# Altium PCB PCB1.PcbDoc
Units mm, origin at the board's own origin, x right, y up, seen from the top; angles counter-clockwise.
Board outline 50.55 x 34.54 mm, 4 copper layers (Top Layer, GND, 3V3, Bottom Layer), stack 0.778 mm thick; 45 components, 36 nets, 199 pads, 54 vias.
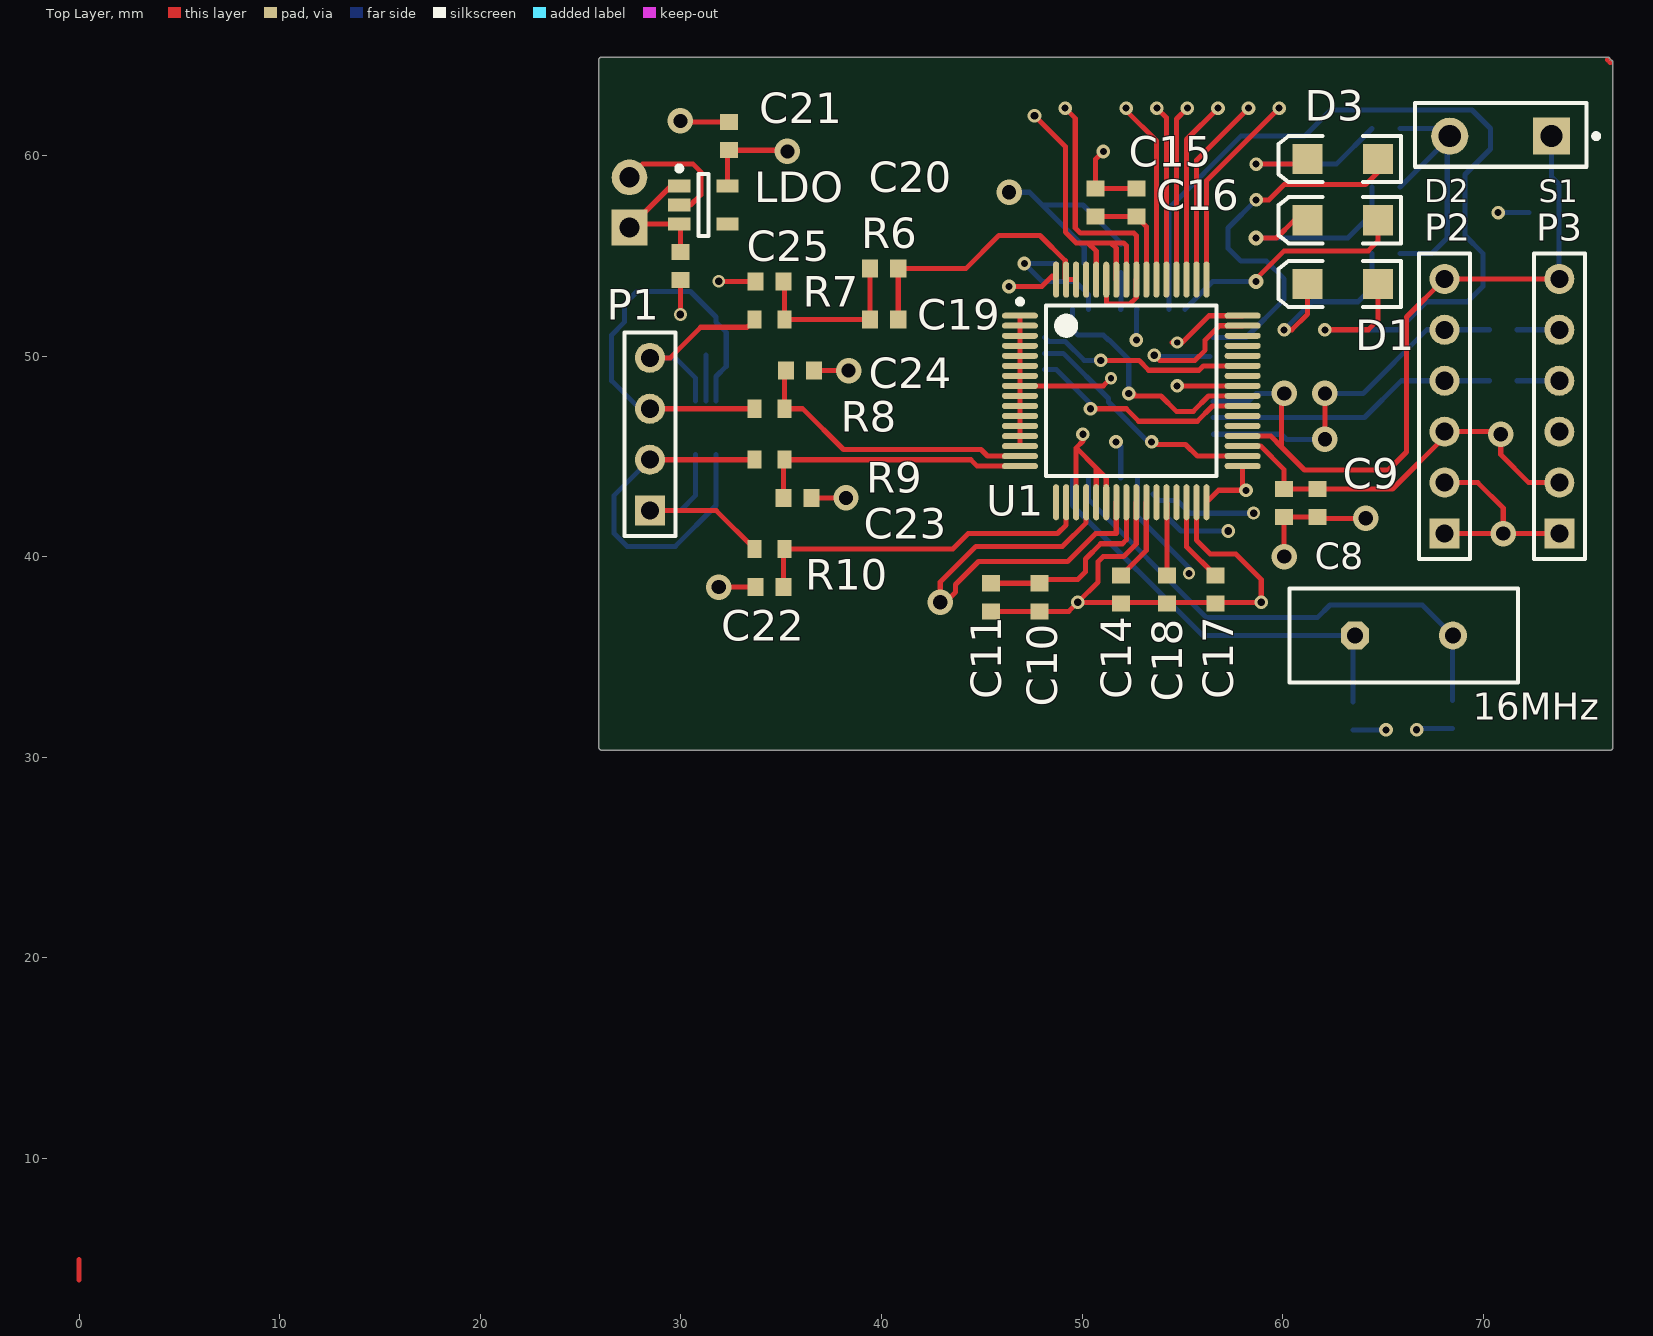
[diagram p0: Top Layer view]
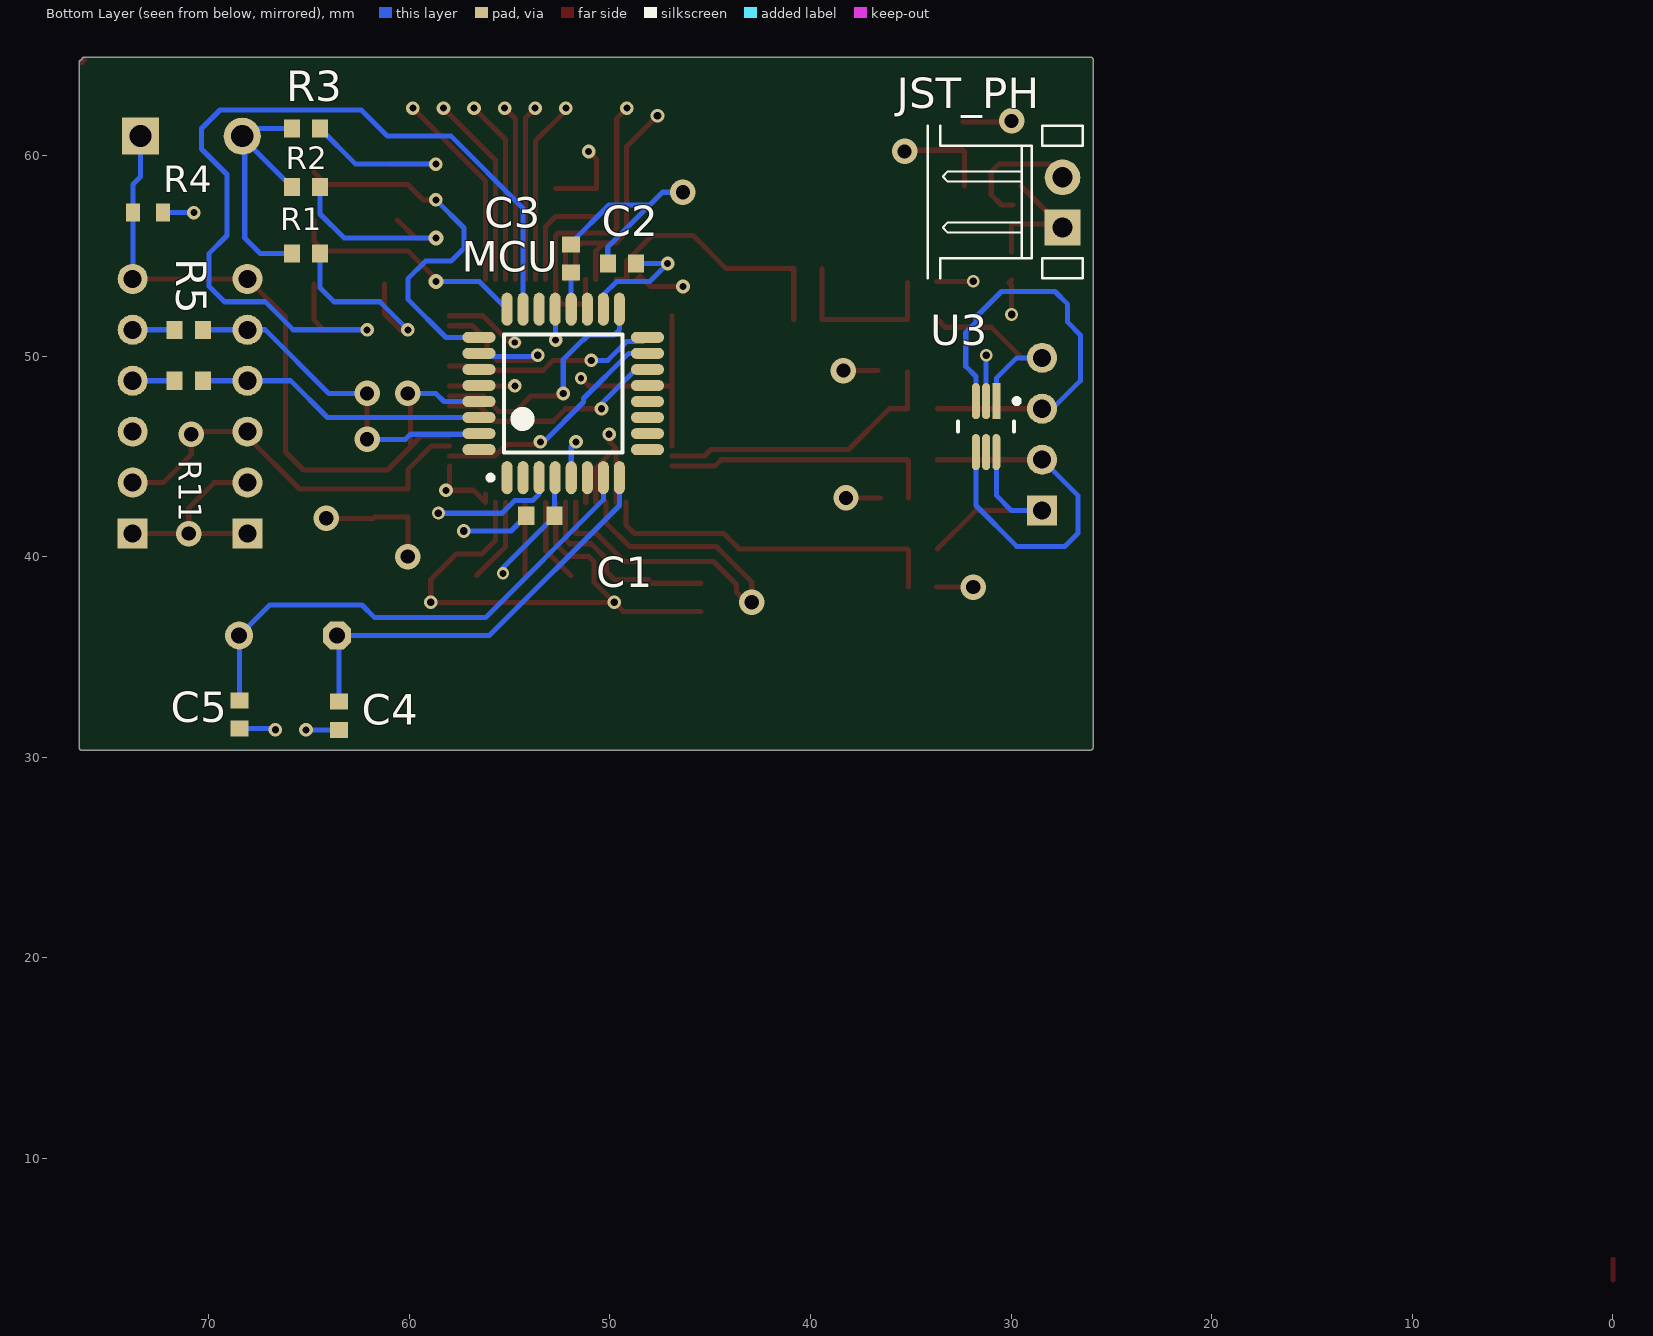
[diagram p1: Bottom Layer view, seen from below]
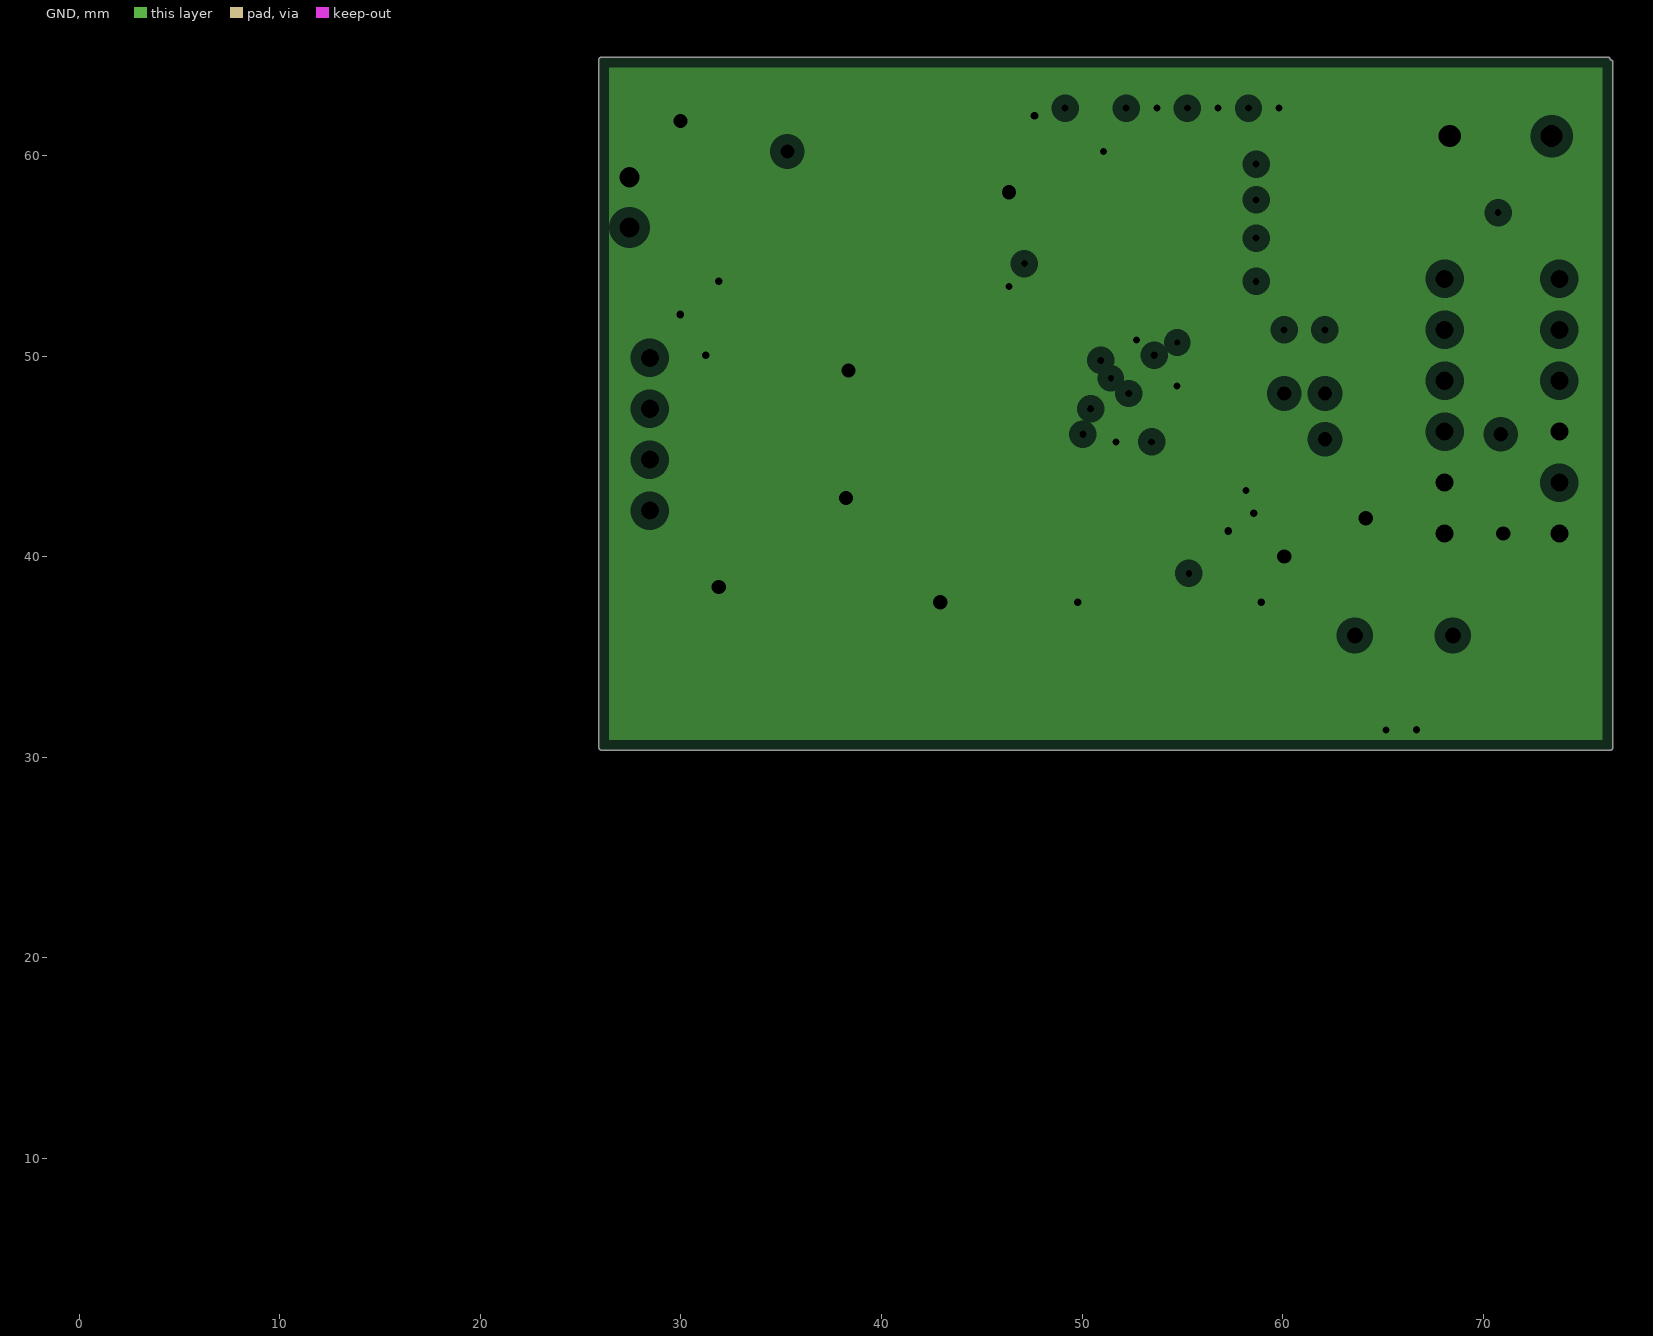
[diagram p2: GND, clearances drawn from the general rule]
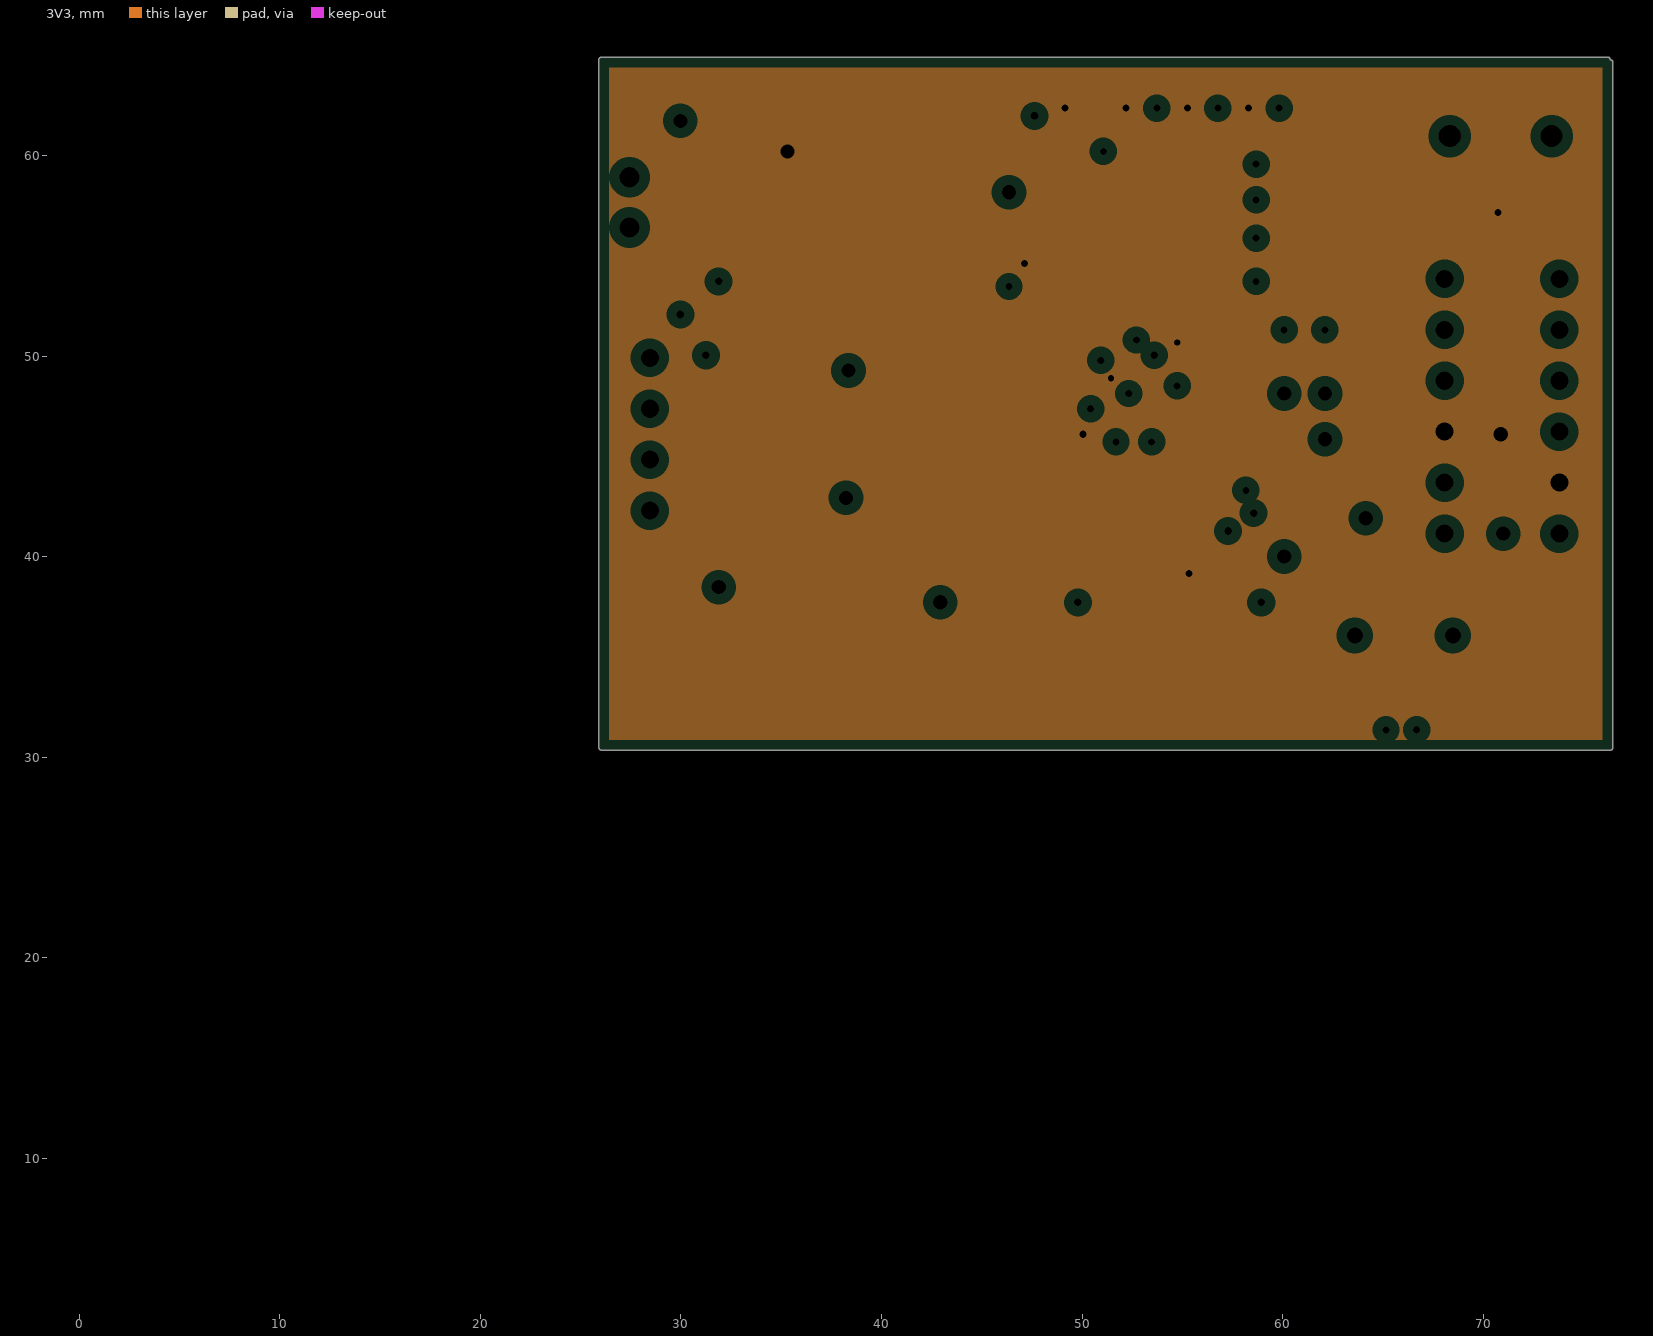
[diagram p3: 3V3, clearances drawn from the general rule]

## Layer stack, top to bottom
Top Solder: solder mask 0.0102, Solder Resist, Dk 3.5
Top Layer: signal copper 0.0356
Dielectric 1: core 0.254, FR-4, Dk 4.2
GND: plane copper 0.036, net GND
Dielectric 3: prepreg 0.127, FR-4, Dk 4.2
3V3: plane copper 0.036, net 3V3
Dielectric 2: core 0.254, FR-4, Dk 4.2
Bottom Layer: signal copper 0.0356
Bottom Solder: solder mask 0.0102, Solder Resist, Dk 3.5

## Board outline
26.035,30.353 cw(c26.035,30.48) 25.908,30.48 25.908,64.77 cw(c26.035,64.77) 26.035,64.897 76.2,64.897 cw(c76.2,64.77) 76.327,64.77 cw(c76.327,64.643) 76.454,64.643 76.454,30.48 cw(c76.327,30.48) 76.327,30.353

## Design rules (kind name [scope] priority, off if disabled: settings)
Clearance [All] p1: gap=0.254 except(0.102: SMDPad-SMDPad; 0.18: Track-SMDPad; 0.24: Track-Track)
MinimumSolderMaskSliver [All] p1: minsoldermaskwidth=0.004
PlaneClearance [All] p1: clearance=0.508
PlaneConnect [All] p1: planeconnectstyle=Relief reliefexpansion=0.508 reliefentries=4 reliefconductorwidth=0.254 reliefairgap=0.254
PolygonConnect [All] p1: connectstyle=Relief reliefconductorwidth=0.254 reliefentries=4 polygonreliefangle="90 Angle" airgapwidth=0.254
RoutingVias [All] p1: holewidth=0.711 width=1.27 viastyle="Through Hole" minholewidth=0.711 minwidth=1.27 maxholewidth=0.711 maxwidth=1.27
SolderMaskExpansion [All] p1: expansion=0.102
UnpouredPolygon [All] p1: allowunpoured=FALSE
Width [All] p1: maxlimit=0.254 minlimit=0.254 preferedwidth=0.254
26 further rules are at their usual default settings.

## Classes and differential pairs
component class U_LP590_LDO_Regulator: C20 C21 JST_PH LDO
component class U_Atmega328p: 16MHz C1 C2 C3 C4 C5 D1 D2 D3 MCU P2 P3 R1 R2 R3 R4 R5 R11 S1
component class U_Analogue_frontend: C22 C23 C24 C25 P1 R7 R8 R9 R10 U3
component class U_ADS1299: C8 C9 C10 C11 C14 C15 C16 C17 C18 C19 R6 U1

## Components (designator, comment, footprint, x,y, rotation, side; value= is the part's Value field where it differs from the comment)
16MHz "ECS-10-13-1" HC-49U 66.04,36.068 r0 top
C1 "Cap" 1608[0603] 53.467,42.037 r180 bottom
C2 "Cap" 1608[0603] 49.403,54.61 r180 bottom
C3 "Cap" 1608[0603] 51.943,54.864 r270 bottom
C4 "Cap" 1608[0603] 63.5,32.066 r90 bottom
C5 "Cap" 1608[0603] 68.453,32.131 r90 bottom
C8 "Cap" 1608[0603] 60.071,42.672 r90 top
C9 "Cap" 1608[0603] 61.722,42.672 r90 top
C10 "Cap" 1608[0603] 47.879,37.973 r270 top
C11 "Cap" 1608[0603] 45.466,37.973 r270 top
C14 "Cap" 1608[0603] 51.943,38.354 r90 top
C15 "Cap" 1608[0603] 50.673,57.658 r270 top
C16 "Cap" 1608[0603] 52.705,57.658 r270 top
C17 "Cap" 1608[0603] 56.642,38.354 r90 top
C18 "Cap" 1608[0603] 54.229,38.354 r90 top
C19 "Cap" 1608[0603] 40.132,51.816 r180 top
C20 "GRM188R71A225KE15D" 1608[0603] 29.972,54.483 r90 top
C21 "GRM188R71A225KE15D" 1608[0603] 32.385,60.96 r270 top
C22 "Cap Semi" 1608[0603] 34.417,38.481 r0 top
C23 "Cap Semi" 1608[0603] 35.814,42.926 r180 top
C24 "Cap Semi" 1608[0603] 35.941,49.276 r180 top
C25 "Cap Semi" 1608[0603] 34.417,53.721 r0 top
D1 "LED2" 3.2X1.6X1.1 62.992,53.594 r180 top
D2 "LED2" 3.2X1.6X1.1 62.992,56.769 r180 top
D3 "LED2" 3.2X1.6X1.1 62.992,59.817 r180 top
JST_PH "ValueValueAux" S2B-EH 27.432,57.658 r90 bottom
LDO "LP5907MFX-3.3/NOPB" DBV005_N 31.115,57.531 r0 top (schematic designator "LDO Regulator")
MCU "ATmega328-AUR" 32A_N 52.324,48.133 r90 bottom
P1 "Electrode connections" HDR1X4 28.448,42.291 r90 top
P2 "FTDI" HDR1X6 68.072,41.148 r90 top
P3 "BlueSMiRF" HDR1X6 73.787,41.148 r90 top
R1 "Res" 1608[0603] 65.151,55.118 r180 bottom
R2 "Res" 1608[0603] 65.151,58.42 r180 bottom
R3 "Res" 1608[0603] 65.151,61.341 r180 bottom
R4 "Res" J1-0603 73.025,57.15 r180 bottom
R5 "Res" 1608[0603] 70.993,51.308 r0 bottom
R6 "Res" 1608[0603] 40.132,54.356 r180 top
R7 "Res3" J1-0603 34.417,51.816 r0 top
R8 "Res3" J1-0603 34.417,47.371 r0 top
R9 "Res3" J1-0603 34.417,44.831 r0 top
R10 "Res3" J1-0603 34.417,40.386 r0 top
R11 "Res" 1608[0603] 70.993,48.768 r0 bottom
S1 "SW-SPST" SPST-2 70.866,60.96 r180 top
U1 "Integrated ECG/EEG" TQFP-PT64_N 52.451,48.26 r0 top
U3 "TPD4E1B06DRLR" SOT50P185X60-6N 31.242,46.482 r270 bottom (schematic designator *)

## Footprints (in the part's own frame and the unit in brackets; to place one, negate y for a bottom-side part, rotate by r counter-clockwise, add the part's x,y. Pads: shape width x height; smd on the part's side, far side on the other; paste and mask are expansions set on the pad)
3.2X1.6X1.1 [mm] "SMT LED; 2 Flat Leads"
  rect 1.5x1.5 smd: 1(-1.75,0) 2(1.75,0)
  silkscreen extent -2.9,-1.15 3.2,1.15
32A_N [mm] "Thin QFP, 32-Leads, Body 7x7mm, Pitch 0.8mm, IPC Medium Density"
  oval 1.65x0.55 smd: 1(-4.2,2.8) 2(-4.2,2) 3(-4.2,1.2) 4(-4.2,0.4) 5(-4.2,-0.4) 6(-4.2,-1.2) 7(-4.2,-2) 8(-4.2,-2.8) 17(4.2,-2.8) 18(4.2,-2) 19(4.2,-1.2) 20(4.2,-0.4) 21(4.2,0.4) 22(4.2,1.2) 23(4.2,2) 24(4.2,2.8)
  oval 0.55x1.65 smd: 9(-2.8,-4.2) 10(-2,-4.2) 11(-1.2,-4.2) 12(-0.4,-4.2) 13(0.4,-4.2) 14(1.2,-4.2) 15(2,-4.2) 16(2.8,-4.2) 25(2.8,4.2) 26(2,4.2) 27(1.2,4.2) 28(0.4,4.2) 29(-0.4,4.2) 30(-1.2,4.2) 31(-2,4.2) 32(-2.8,4.2)
  silkscreen extent -4.32,-2.95 2.95,3.75, body extent -3.5,-3.5 3.5,3.5, height 1.2
1608[0603] [mm] "Chip Capacitor, Body 1.6x0.8mm, IPC High Density"
  rect 0.8x0.9 smd: 1(-0.7,0) 2(0.7,0)
  body extent -0.87,-0.48 0.87,0.48, height 1.3
DBV005_N [mm] "SOT23, 5-Leads, Body 2.9x1.6mm, Pitch 0.95mm, Lead Span 2.8mm, IPC Medium Density"
  rect 1.1x0.65 smd: 1(-1.2,0.95) 2(-1.2,0) 3(-1.2,-0.95) 4(1.2,-0.95) 5(1.2,0.95)
  silkscreen extent -1.32,-1.55 0.25,1.95, body extent -0.9,-1.55 0.9,1.55, height 1.45
HC-49U [mm] "Quartz Crystal, Thru-Hole; 2 Leads; Body 11.35 x 4.65 x 13.46 mm (LxWxH max)"
  oct 1.4x1.4 hole 0.8: 1(-2.44,0)
  round 1.4 hole 0.8: 2(2.44,0)
  silkscreen extent -5.7,-2.35 5.7,2.35
HDR1X4 [mm] "Connector; Header; 4 Position"
  rect 1.5x1.5 hole 0.9: 1(0,0)
  round 1.5 hole 0.9: 2(2.54,0) 3(5.08,0) 4(7.62,0)
  silkscreen extent -1.27,-1.27 8.89,1.27
HDR1X6 [mm] "Connector; Header; 6 Position"
  rect 1.5x1.5 hole 0.9: 1(0,0)
  round 1.5 hole 0.9: 2(2.54,0) 3(5.08,0) 4(7.62,0) 5(10.16,0) 6(12.7,0)
  silkscreen extent -1.27,-1.27 13.97,1.27
J1-0603 [mm] "Chip Resistor, Body 1.6x0.8mm, IPC High Density"
  rect 0.7x0.9 smd: 1(-0.75,0) 2(0.75,0)
  body extent -0.85,-0.48 0.85,0.48, height 0.9
S2B-EH [mil] "EH Connector 2.5mm pitch, side entry"
  rect 70x70 hole 40: 1(-49.21,0)
  round 70 hole 40: 2(49.21,0)
  silkscreen extent -149,-40 151,265, body extent -149,-40 151,265, height 165
SOT50P185X60-6N [mm] "SOT23, 6-Leads, Body 1.60x1.85mm, Pitch 0.50mm, IPC Medium Density"
  rect 1.8x0.4 smd: 1(-1.27,0.508)
  oval 1.8x0.4 smd: 2(-1.27,0) 3(-1.27,-0.508) 4(1.27,-0.508) 5(1.27,0) 6(1.27,0.508)
  silkscreen extent -1.39,-1.4 0.25,1.65, body extent -0.65,-0.85 0.65,0.85, height 0.6
SPST-2 [mm] "Switch; 2 Leads"
  rect 1.85x1.85 hole 1.1: 1(-2.54,0)
  round 1.85 hole 1.1: 2(2.54,0)
  silkscreen extent -4.89,-1.65 4.28,1.52
TQFP-PT64_N [mm] "Thin QFP, 64-Leads, Body 10x10mm, Pitch 0.5mm, IPC Medium Density"
  oval 1.8x0.3 smd: 1(-5.55,3.75) 2(-5.55,3.25) 3(-5.55,2.75) 4(-5.55,2.25) 5(-5.55,1.75) 6(-5.55,1.25) 7(-5.55,0.75) 8(-5.55,0.25) 9(-5.55,-0.25) 10(-5.55,-0.75) 11(-5.55,-1.25) 12(-5.55,-1.75) 13(-5.55,-2.25) 14(-5.55,-2.75) 15(-5.55,-3.25) 16(-5.55,-3.75) 33(5.55,-3.75) 34(5.55,-3.25) 35(5.55,-2.75) 36(5.55,-2.25) 37(5.55,-1.75) 38(5.55,-1.25) 39(5.55,-0.75) 40(5.55,-0.25) 41(5.55,0.25) 42(5.55,0.75) 43(5.55,1.25) 44(5.55,1.75) 45(5.55,2.25) 46(5.55,2.75) 47(5.55,3.25) 48(5.55,3.75)
  oval 0.3x1.8 smd: 17(-3.75,-5.55) 18(-3.25,-5.55) 19(-2.75,-5.55) 20(-2.25,-5.55) 21(-1.75,-5.55) 22(-1.25,-5.55) 23(-0.75,-5.55) 24(-0.25,-5.55) 25(0.25,-5.55) 26(0.75,-5.55) 27(1.25,-5.55) 28(1.75,-5.55) 29(2.25,-5.55) 30(2.75,-5.55) 31(3.25,-5.55) 32(3.75,-5.55) 49(3.75,5.55) 50(3.25,5.55) 51(2.75,5.55) 52(2.25,5.55) 53(1.75,5.55) 54(1.25,5.55) 55(0.75,5.55) 56(0.25,5.55) 57(-0.25,5.55) 58(-0.75,5.55) 59(-1.25,5.55) 60(-1.75,5.55) 61(-2.25,5.55) 62(-2.75,5.55) 63(-3.25,5.55) 64(-3.75,5.55)
  silkscreen extent -5.67,-4.25 4.25,4.57, body extent -5,-5 5,5, height 1.2

## Part data
16MHz: "Crystal Oscillator"
C1 C2 C3 C4 C5 C8 C9 C10 C11 C14 C15 C16 C17 C18 C19: "Capacitor"
C20: "CAP, CERM, 2.2uF, 10V, +/-10%, X7R, 0603"
C21: "CAP, CERM, 2.2 µF, 10 V, +/- 10%, X7R, 0603"
C22 C23 C24 C25: "Capacitor (Semiconductor SIM Model)"
D1 D2 D3: "Typical RED, GREEN, YELLOW, AMBER GaAs LED"
JST_PH: library part JST-2, "=Description"
LDO: "ULTRA LOW-NOISE, 250-mA LINEAR REGULATOR FOR RF AND ANALOG CIRCUITS REQUIRES NO BYPASS CAPACITOR, DBV0005A"
MCU: "8-bit AVR Microcontroller, 32KB Flash, 1KB EEPROM, 2KB SRAM, 32-pin TQFP, Industrial Grade (-40°C to 85°C)"
P1: library part "Header 4", "Header, 4-Pin"
P2 P3: library part "Header 6", "Header, 6-Pin"
R1 R2 R3 R4 R5 R6 R11: library part Res1, "Resistor"
R7 R8 R9 R10: "Resistor"
S1: "Single-Pole, Single-Throw Switch"
U1: library part ADS1298-TQFP
U3: "TVS DIODE 5.5VWM 14.5VC 6SOT"

## Via types
v1: diameter 0.68, hole 0.351, Top Layer to Bottom Layer, 22 vias
v2: diameter 1.27, hole 0.711, Top Layer to Bottom Layer, 14 vias
v3: diameter 0.68, hole 0.35, Top Layer to Bottom Layer, 4 vias
v4: diameter 0.68, hole 0.381, Top Layer to Bottom Layer, 2 vias
v5: diameter 0.61, hole 0.31, Top Layer to Bottom Layer, 1 vias
v6: diameter 0.62, hole 0.31, Top Layer to Bottom Layer, 1 vias
v7: diameter 0.65, hole 0.38, Top Layer to Bottom Layer, 1 vias
v8: diameter 0.68, hole 0.38, Top Layer to Bottom Layer, 1 vias
v9: diameter 0.61, hole 0.351, Top Layer to Bottom Layer, 1 vias
v10: diameter 0.68/0.68 (per signal layer), hole 0.381, Top Layer to Bottom Layer, 1 vias
v11: diameter 0.63, hole 0.381, Top Layer to Bottom Layer, 1 vias
v12: diameter 0.63, hole 0.381, GND to Bottom Layer, 1 vias
v13: diameter 0.689, hole 0.351, Top Layer to Bottom Layer, 1 vias
v14: diameter 0.75, hole 0.35, Top Layer to Bottom Layer, 1 vias
v15: diameter 0.635, hole 0.381, Top Layer to Bottom Layer, 1 vias
v16: diameter 0.75, hole 0.351, Top Layer to Bottom Layer, 1 vias

## Nets (pads, with @x,y where several pads share a name; then routed paths per layer and width w, separated by ;. In a path a pad name is that pad's centre, name@x,y a point inside that pad or via, vN(x,y) a via of type N, cw(c..) or ccw(c..) an arc to the next point about the centre after c; other vN are vias at no path point)
3V3: C1.2 C2.2 C8.2 C9.2 C21.2 LDO.5 MCU.4 MCU.18 P2.3 P3.2 R4.2 U1.1 U1.2 U1.3 U1.4 U1.5 U1.6 U1.7 U1.8 U1.9 U1.10 U1.11 U1.12 U1.13 U1.14 U1.19 U1.21 U1.22 U1.35 U1.48 U1.50 U1.52 U1.54 U1.56 U1.59 | length 104.5
  Top Layer w0.254: LDO.5 C21.2@32.315,60.19 ; C21.2 v2@35.244,60.26 ; U1.14 U1.13 U1.12 U1.11 U1.10 U1.9 U1.8 ; U1.1 U1.2 U1.3 U1.4 U1.5 U1.6 U1.7 U1.8 ; v1(49.149,62.357) 49.657,61.849 49.657,56.388 49.911,56.134 52.578,56.134 52.701,56.011 U1.56 52.695,53.81 52.695,52.908 52.39,52.603 51.266,52.603 51.207,52.662 51.207,53.81 U1.59 ; U1.19 49.701,45.422 ; v1(50.038,46.101) 50.038,45.759 49.701,45.422 ; U1.21 50.701,44.422 ; U1.22 51.201,43.922 50.701,44.422 ; v5(51.435,48.895) 51.054,48.514 50.927,48.514 U1.8 ; v1(52.197,62.357) 52.197,62.23 53.701,60.726 U1.54 ; v6@54.483,50.673 v6(54.737,50.673) 54.991,50.673 56.328,52.01 U1.48 ; U1.52 54.701,61.813 v1(55.245,62.357) ; U1.50 55.701,59.765 v1(58.293,62.357) ; U1.35 58.897,45.51 60.071,44.336 C8.2 C9.2 65.467,43.372 P2.3@68.072,45.977 ; P2.3 v2@70.739,46.228 ; v2(70.866,46.101) 70.866,45.085 72.263,43.688 P3.2 ; 49.701,45.422 50.701,44.422
  Bottom Layer w0.254: C2.2 v1(47.117,54.61) 48.006,53.721 49.657,53.721 50.324,53.054 MCU.18 ; C1.2@52.767,42 55.321,39.446 v9(55.321,39.167) ; C1.2 MCU.4@52.767,43.89 ; v1(70.739,57.15) R4.2
  other v2: 35.306,60.198
BAR: P1.1 R10.1 U3.6 | length 11.1
  Top Layer w0.254: P1.1 31.762,42.291 R10.1
  Bottom Layer w0.254: P1.1@28.448,42.745 P1.1 29.972,42.291 30.734,43.053 U3.6@30.734,45.085
CS: MCU.14 U1.39 | length 11.4
  Top Layer w0.254: v3(50.419,47.371) 52.197,47.371 52.818,46.75 55.743,46.75 56.503,47.51 U1.39
  Bottom Layer w0.254: MCU.14 48.711,49.333 50.419,47.625 v3(50.419,47.371)
D\R\D\Y: MCU.26 U1.47 | length 8.3
  Top Layer w0.254: v1(53.594,50.038) 53.848,49.784 55.626,49.784 56.134,50.292 56.134,50.8 56.844,51.51 U1.47
  Bottom Layer w0.254: v1(53.594,50.038) 53.65,49.982 MCU.26@56.373,49.982
FOO: P1.4 R7.1 U3.1 | length 9.9
  Top Layer w0.254: P1.4 29.464,49.911 30.988,51.435 33.286,51.435 R7.1
  Bottom Layer w0.254: P1.4 29.718,49.911 30.734,48.895 U3.1
GND: C1.1 C2.1 C3.1 C4.1 C5.1 C8.1 C9.1 C10.2 C11.2 C14.1 C15.1 C16.1 C17.1 C18.1 C20.1 C21.1 C22.1 C23.1 C24.1 C25.1 JST_PH.2 LDO.2 MCU.3 MCU.5 MCU.21 P2.1 P2.2 P3.1 P3.3 R1.1 R2.1 R3.1 S1.2 U1.20 U1.23 U1.25 U1.31 U1.32 U1.33 U1.41 U1.49 U1.51 U1.53 U1.57 U1.58 U1.60 U1.64 U3.2 | length 183
  Top Layer w0.254: JST_PH.2@27.94,59.436 27.432,58.928 JST_PH.2 28.087,59.563 30.607,59.563 30.988,59.182 30.988,58.039 30.48,57.531 LDO.2 ; v15(29.972,52.07) 29.972,53.529 30.099,53.656 C20.1 ; v2(29.972,61.722) 30.48,61.722 30.542,61.66 C21.1 ; v2(31.877,38.481) C22.1 ; v11(31.877,53.721) C25.1 ; C23.1 v2(38.227,42.926) ; C24.1 v2(38.354,49.276) ; v2(42.926,37.719) 42.926,38.735 44.704,40.513 49.022,40.513 50.201,41.692 U1.20 ; v2@43.18,37.719 43.688,38.227 43.688,38.608 44.831,39.751 49.276,39.751 50.673,41.148 51.689,41.148 51.701,41.16 U1.23 ; C11.2 C10.2 49.338,37.273 v4(49.784,37.719) ; v1(46.355,53.467) 47.991,53.467 48.499,53.975 U1.64@48.664,53.81 ; v10@47.625,61.98 49.163,60.442 49.163,56.183 49.706,55.64 50.292,55.64 ; U1.60 50.701,55.231 50.292,55.64 ; v1(51.054,60.198) 50.673,59.817 C15.1 C16.1 ; U1.58 51.701,55.374 51.435,55.64 ; U1.57 52.201,55.509 52.07,55.64 51.435,55.64 ; U1.25 52.695,42.704 52.695,40.63 52.07,40.005 51.054,40.005 50.8,39.751 50.8,38.735 v4(49.784,37.719) ; v1(53.721,62.357) 54.201,61.877 U1.53 ; v1@54.737,48.51 U1.41 ; U1.51 55.201,60.789 v3(56.769,62.357) ; U1.31 55.701,40.819 56.388,40.132 57.658,40.132 58.928,38.862 v4(58.928,37.719) v4(49.784,37.719) ; U1.32@56.201,43.113 U1.32 56.798,43.307 v1(58.166,43.307) 58.001,43.472 U1.33 ; U1.49 56.201,58.741 v1(59.817,62.357) ; v2(60.071,40.005) C8.1 C9.1 ; C9.1@61.784,41.91 v2(64.135,41.91) ; P2.1 v2(70.993,41.148) ; P2.2 69.723,43.688 70.993,42.418 v2(70.993,41.148) ; P3.1 v2(70.993,41.148) ; 50.292,55.64 51.435,55.64
  Bottom Layer w0.254: U3.2 v12(31.242,50.038) ; v2(46.355,58.166) 47.371,58.166 48.006,57.531 ; C2.1 50.103,55.434 48.006,57.531 ; MCU.5 v1@51.924,45.485 ; C3.1 51.943,55.626 50.038,57.531 48.006,57.531 ; v1(52.705,50.8) 52.705,52.314 MCU.21 ; MCU.3@53.524,43.123 53.848,42.799 54.737,42.799 55.372,42.164 v7(58.547,42.164) ; C1.1@54.229,41.975 54.929,41.275 v8(57.277,41.275) ; C4.1 v3(65.148,31.366) ; R1.1 67.437,55.118 68.199,55.88 S1.2@68.199,60.768 ; R2.1 S1.2@68.199,60.768 ; R3.1 S1.2@67.945,61.341 ; v3@66.737,31.431 C5.1 ; S1.2@68.199,60.833 S1.2@68.199,60.768 ; S1.2@68.326,60.895 S1.2@68.199,60.768
  other v1: 51.689,45.72 54.737,48.514
  other v3: 66.675,31.369
  other v10: 47.625,61.976
IN1N: P1.3 R8.1 U3.3 | length 21.7
  Top Layer w0.254: P1.3 R8.1
  Bottom Layer w0.254: P1.3 27.94,47.371 26.543,48.768 26.543,51.054 27.178,51.689 27.178,52.578 27.813,53.213 30.48,53.213 31.75,51.943 31.75,51.689 32.258,51.181 32.258,49.49 31.75,48.982 U3.3
IN1P: P1.2 R9.1 U3.4 | length 18.4
  Top Layer w0.254: P1.2 R9.1
  Bottom Layer w0.254: P1.2 26.67,43.053 26.67,41.148 27.305,40.513 29.718,40.513 31.75,42.545 U3.4@31.75,45.085
MISO: MCU.16 U1.43 | length 10.6
  Top Layer w0.254: v1(50.927,49.784) 52.828,49.784 53.322,49.29 55.831,49.29 56.051,49.51 U1.43
  Bottom Layer w0.254: MCU.16 48.342,50.715 49.171,50.715 50.102,49.784 v1(50.927,49.784)
MOSI: MCU.15 U1.34 | length 12.1
  Top Layer w0.254: v1(53.467,45.72) 53.594,45.593 55.158,45.593 55.741,45.01 U1.34
  Bottom Layer w0.254: MCU.15 49.054,50.133 51.308,47.879 51.308,47.712 53.3,45.72 v1(53.467,45.72)
Net16MHz_1: 16MHz.1 C4.2 MCU.8 | length 21.3
  Bottom Layer w0.254: MCU.8 49.524,42.551 56.007,36.068 16MHz.1 ; C4.2 16MHz.1@63.5,35.968
Net16MHz_2: 16MHz.2 C5.2 MCU.7 | length 25.8
  Bottom Layer w0.254: MCU.7 50.324,42.831 56.198,36.957 61.722,36.957 62.357,37.592 66.956,37.592 16MHz.2 ; C5.2 16MHz.2@68.453,36.041
NetC3_2: C3.2 MCU.20 | length 1.8
  Bottom Layer w0.254: MCU.20 51.943,52.352 C3.2
NetC10_1: C10.1 C11.1 U1.24 | length 9.6
  Top Layer w0.254: C11.1 C10.1 ; C10.1@48.068,38.862 49.784,38.862 50.165,39.243 50.165,39.878 50.927,40.64 52.006,40.64 52.201,40.835 U1.24
NetC14_2: C14.2 U1.26 | length 4.2
  Top Layer w0.254: C14.2 53.195,40.306 U1.26@53.195,42.704
NetC15_2: C15.2 C16.2 U1.55 | length 5.4
  Top Layer w0.254: C15.2 C16.2 53.201,56.462 U1.55
NetC17_2: C17.2 U1.30 | length 4.2
  Top Layer w0.254: U1.30@55.207,42.704 55.207,40.489 C17.2
NetC18_2: C18.2 U1.28 | length 3.6
  Top Layer w0.254: C18.2 U1.28@54.229,42.682
NetC19_1: C19.1 R6.1 U1.62 U1.63 | length 13.5
  Top Layer w0.254: C19.1 R6.1 44.196,54.356 45.847,56.007 47.9,56.007 49.158,54.749 U1.63@49.158,53.853 ; U1.63 U1.62
NetC19_2: C19.2 C25.2 R6.2 R7.2 | length 8.7
  Top Layer w0.254: C25.2@35.167,53.671 R7.2 C19.2 R6.2
NetC23_2: C23.2 R9.2 U1.16 | length 13.7
  Top Layer w0.254: C23.2 R9.2@35.114,44.778 ; R9.2 44.45,44.831 44.771,44.51 U1.16
NetC24_2: C24.2 R8.2 U1.15 | length 14.5
  Top Layer w0.254: C24.2@35.167,49.202 R8.2 36.068,47.371 38.1,45.339 44.958,45.339 45.281,45.016 U1.15@46.895,45.016
NetD1_1: D1.1 MCU.23 | length 45.7
  Top Layer w0.254: v1(62.103,51.308) 64.262,51.308 64.742,51.788 D1.1
  Bottom Layer w0.254: MCU.23 54.324,57.372 57.912,60.96 61.087,60.96 62.393,62.266 69.433,62.266 70.358,61.341 70.358,60.325 69.088,59.055 69.088,56.007 69.977,55.118 69.977,53.467 69.215,52.705 67.183,52.705 65.786,51.308 v1(62.103,51.308)
NetD1_2: D1.2 R1.2 | length 10
  Top Layer w0.254: v13(60.071,51.308) 60.452,51.308 61.242,52.098 D1.2
  Bottom Layer w0.254: v13(60.071,51.308) 61.468,52.705 63.754,52.705 64.451,53.402 R1.2
NetD2_1: D2.1 MCU.24 | length 12.1
  Top Layer w0.254: v16(58.674,53.721) 58.674,53.848 60.071,55.245 64.262,55.245 64.742,55.725 D2.1
  Bottom Layer w0.254: MCU.24 56.512,53.721 v16(58.674,53.721)
NetD2_2: D2.2 R2.2 | length 9.9
  Top Layer w0.254: v14(58.674,55.88) 59.69,55.88 D2.2@60.579,56.769
  Bottom Layer w0.254: v14(58.674,55.88) 63.246,55.88 64.451,57.085 R2.2
NetD3_1: D3.1 MCU.25 | length 18.4
  Top Layer w0.254: v1(58.674,57.785) 59.309,57.785 60.071,58.547 64.135,58.547 D3.1@64.742,59.154
  Bottom Layer w0.254: MCU.25 56.53,50.927 58.166,50.927 60.071,52.832 60.071,53.848 59.182,54.737 57.912,54.737 57.277,55.372 57.277,56.388 v1(58.674,57.785)
NetD3_2: D3.2 R3.2 | length 8.8
  Top Layer w0.254: v1(58.674,59.563) D3.2@60.988,59.563
  Bottom Layer w0.254: v1(58.674,59.563) 62.673,59.563 R3.2
NetP3_4: P3.4 R11.2 | length 2.1
  Bottom Layer w0.254: R11.2 P3.4
NetP3_5: P3.5 R5.2 | length 2.1
  Bottom Layer w0.254: R5.2 P3.5
R\E\S\E\T: MCU.29 P2.6 P3.6 R4.1 S1.1 U1.36 | length 38.1
  Top Layer w0.254: U1.36 59.4,46.01 59.944,45.466 ; v2(60.071,48.133) 59.944,48.006 59.944,45.466 ; P3.6 P2.6 66.167,51.943 66.167,45.212 65.278,44.323 61.087,44.323 59.944,45.466
  Bottom Layer w0.254: MCU.29 58.274,47.733 58.674,48.133 v2(60.071,48.133) ; S1.1 73.406,58.928 73.775,58.559 R4.1 73.775,53.86 P3.6
RAW: C20.2 JST_PH.1 LDO.1 LDO.3 | length 6.6
  Top Layer w0.254: JST_PH.1 JST_PH.1@27.605,56.581 ; LDO.1@29.505,58.481 JST_PH.1@27.605,56.581 ; LDO.3 JST_PH.1@27.605,56.581 ; C20.2 LDO.3@29.972,56.524
RX: MCU.31 P2.5 R5.1 | length 17.4
  Top Layer w0.254: v2(62.103,45.847) v2(62.103,48.133)
  Bottom Layer w0.254: MCU.31@56.556,46.101 59.944,46.101 60.198,45.847 v2(62.103,45.847) ; v2(62.103,48.133) 64.008,48.133 67.183,51.308 P2.5 R5.1
SCLK: MCU.17 U1.40 | length 12.7
  Top Layer w0.254: v1(52.324,48.133) 52.578,48.133 52.451,48.006 53.935,48.006 54.697,47.244 55.539,47.244 56.305,48.01 U1.40
  Bottom Layer w0.254: MCU.17 49.524,51.314 49.784,51.054 51.054,51.054 51.308,50.8 51.348,50.8 52.324,49.824 v1(52.324,48.133)
SDJBDJAHDB: C22.2 R10.2 U1.18 | length 17.5
  Top Layer w0.254: C22.2 R10.2@35.117,40.336 ; R10.2 43.561,40.386 44.323,41.148 48.768,41.148 49.201,41.581 U1.18
TX: MCU.30 P2.4 R11.1 | length 14.5
  Bottom Layer w0.254: MCU.30 64.078,46.933 65.913,48.768 P2.4 R11.1
pads on no net: LDO.4 MCU.1 MCU.2 MCU.6 MCU.9 MCU.10 MCU.11 MCU.12 MCU.13 MCU.19 MCU.22 MCU.27 MCU.28 MCU.32 U1.17 U1.27 U1.29 U1.37 U1.38 U1.42 U1.44 U1.45 U1.46 U1.61 U3.5
copper on no net: | length 1.2
  Top Layer w0.254: 0,3.937 0,4.953 ; 76.2,64.77 76.327,64.643

## Polygon pours and split planes (outlines as drawn)
GND on GND (split plane): 75.944,30.863 26.418,30.863 26.418,64.387 75.944,64.387
3V3 on 3V3 (split plane): 75.944,30.863 26.418,30.863 26.418,64.387 75.944,64.387

## Silkscreen, mask and mechanical layers (free items; w line width, h text height)
Drill Drawing:
  circle w0.025: c81.105,70.104 r0.381
  circle w0.025: c81.105,70.104 r0.635
  circle w0.025: c81.105,39.624 r0.635
  lines w0.025: 80.47,35.814 81.105,35.179 81.74,35.814 81.105,36.449 80.47,35.814 ; 80.47,42.799 81.105,43.116 81.74,42.799 81.423,43.434 81.74,44.069 81.105,43.752 80.47,44.069 80.788,43.434 80.47,42.799 ; 80.47,46.926 80.788,46.926 80.788,46.609 81.423,46.609 81.423,46.926 81.74,46.926 81.74,47.561 81.423,47.561 81.423,47.879 80.788,47.879 80.788,47.561 80.47,47.561 80.47,46.926 ; 80.47,50.419 81.74,50.419 81.74,51.689 80.47,51.689 80.47,50.419 ; 80.47,54.546 80.788,54.546 81.105,54.229 81.423,54.546 81.74,54.546 81.423,54.864 81.74,55.181 81.423,55.181 81.105,55.499 80.788,55.181 80.47,55.181 80.788,54.864 80.47,54.546 ; 80.47,59.309 81.74,59.309 81.105,58.039 80.47,59.309 ; 80.47,61.849 81.74,61.849 81.74,63.119 80.47,63.119 80.47,61.849 ; 80.47,65.659 80.47,65.977 80.788,66.294 80.47,66.611 80.47,66.929 80.788,66.929 81.105,66.611 81.423,66.929 81.74,66.929 81.74,66.611 81.423,66.294 81.74,65.977 81.74,65.659 81.423,65.659 81.105,65.977 80.788,65.659 80.47,65.659 ; 80.724,50.673 81.486,50.673 81.486,51.435 80.724,51.435 80.724,50.673
  lines w0.381: 78.74,34.036 177.266,34.036 ; 78.74,72.136 177.266,72.136 ; 92.732,30.226 92.732,75.946 ; 110.457,30.226 110.457,75.946 ; 144.635,30.226 144.635,75.946 ; 157.484,30.226 157.484,75.946 ; 78.74,30.226 177.266,30.226 177.266,75.946 78.74,75.946 78.74,30.226
  text "Symbol" at 81.026,73.279 h1.83
  text "Hit Count" at 93.875,73.279 h1.83
  text "Finished Hole Size" at 111.6,73.279 h1.83
  text "Plated" at 145.778,73.279 h1.83
  text "Hole Type" at 158.627,73.279 h1.83
  text "2" at 93.875,69.469 h1.52
  text "0.310mm (12.20mil)" at 111.6,69.469 h1.52
  text "PTH" at 145.778,69.469 h1.52
  text "Round" at 158.627,69.469 h1.52
  text "2" at 93.875,65.659 h1.52
  text "0.380mm (14.96mil)" at 111.6,65.659 h1.52
  text "PTH" at 145.778,65.659 h1.52
  text "Round" at 158.627,65.659 h1.52
  text "2" at 93.875,61.849 h1.52
  text "0.800mm (31.50mil)" at 111.6,61.849 h1.52
  text "PTH" at 145.778,61.849 h1.52
  text "Round" at 158.627,61.849 h1.52
  text "2" at 93.875,58.039 h1.52
  text "1.016mm (40.00mil)" at 111.6,58.039 h1.52
  text "PTH" at 145.778,58.039 h1.52
  text "Round" at 158.627,58.039 h1.52
  text "2" at 93.875,54.229 h1.52
  text "1.100mm (43.31mil)" at 111.6,54.229 h1.52
  text "PTH" at 145.778,54.229 h1.52
  text "Round" at 158.627,54.229 h1.52
  text "5" at 93.875,50.419 h1.52
  text "0.350mm (13.78mil)" at 111.6,50.419 h1.52
  text "PTH" at 145.778,50.419 h1.52
  text "Round" at 158.627,50.419 h1.52
  text "5" at 93.875,46.609 h1.52
  text "0.381mm (15.00mil)" at 111.6,46.609 h1.52
  text "PTH" at 145.778,46.609 h1.52
  text "Round" at 158.627,46.609 h1.52
  text "14" at 93.875,42.799 h1.52
  text "0.711mm (28.00mil)" at 111.6,42.799 h1.52
  text "PTH" at 145.778,42.799 h1.52
  text "Round" at 158.627,42.799 h1.52
  text "16" at 93.875,38.989 h1.52
  text "0.900mm (35.43mil)" at 111.6,38.989 h1.52
  text "PTH" at 145.778,38.989 h1.52
  text "Round" at 158.627,38.989 h1.52
  text "25" at 93.875,35.179 h1.52
  text "0.351mm (13.82mil)" at 111.6,35.179 h1.52
  text "PTH" at 145.778,35.179 h1.52
  text "Round" at 158.627,35.179 h1.52
  text "75 Total" at 93.875,31.369 h1.52